# EAGLE board Mother Board_ver2.0.0 (EAGLE 9.6.2)
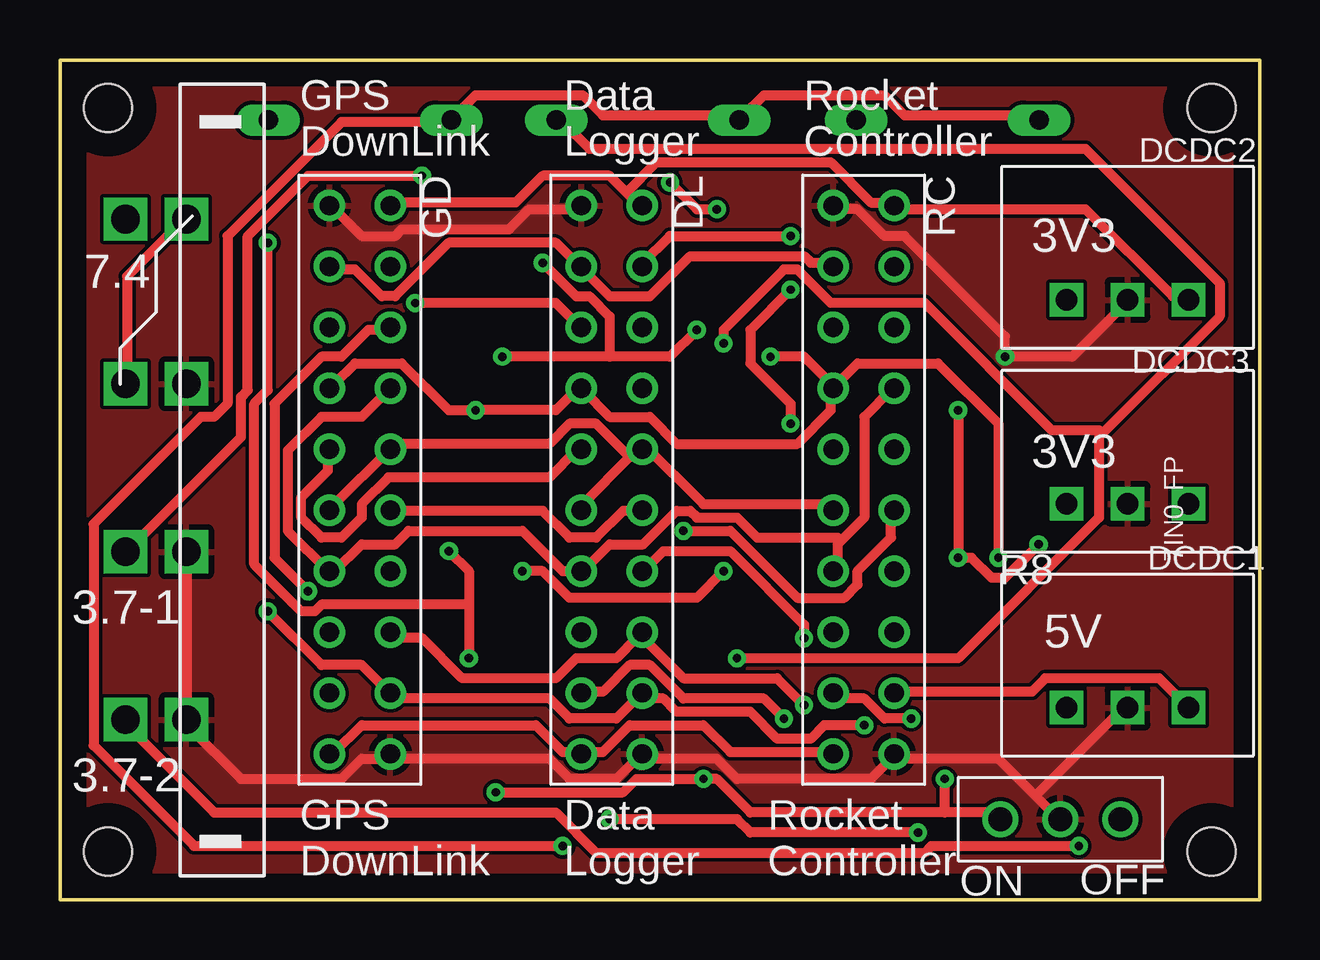
[diagram p0: board, top side]
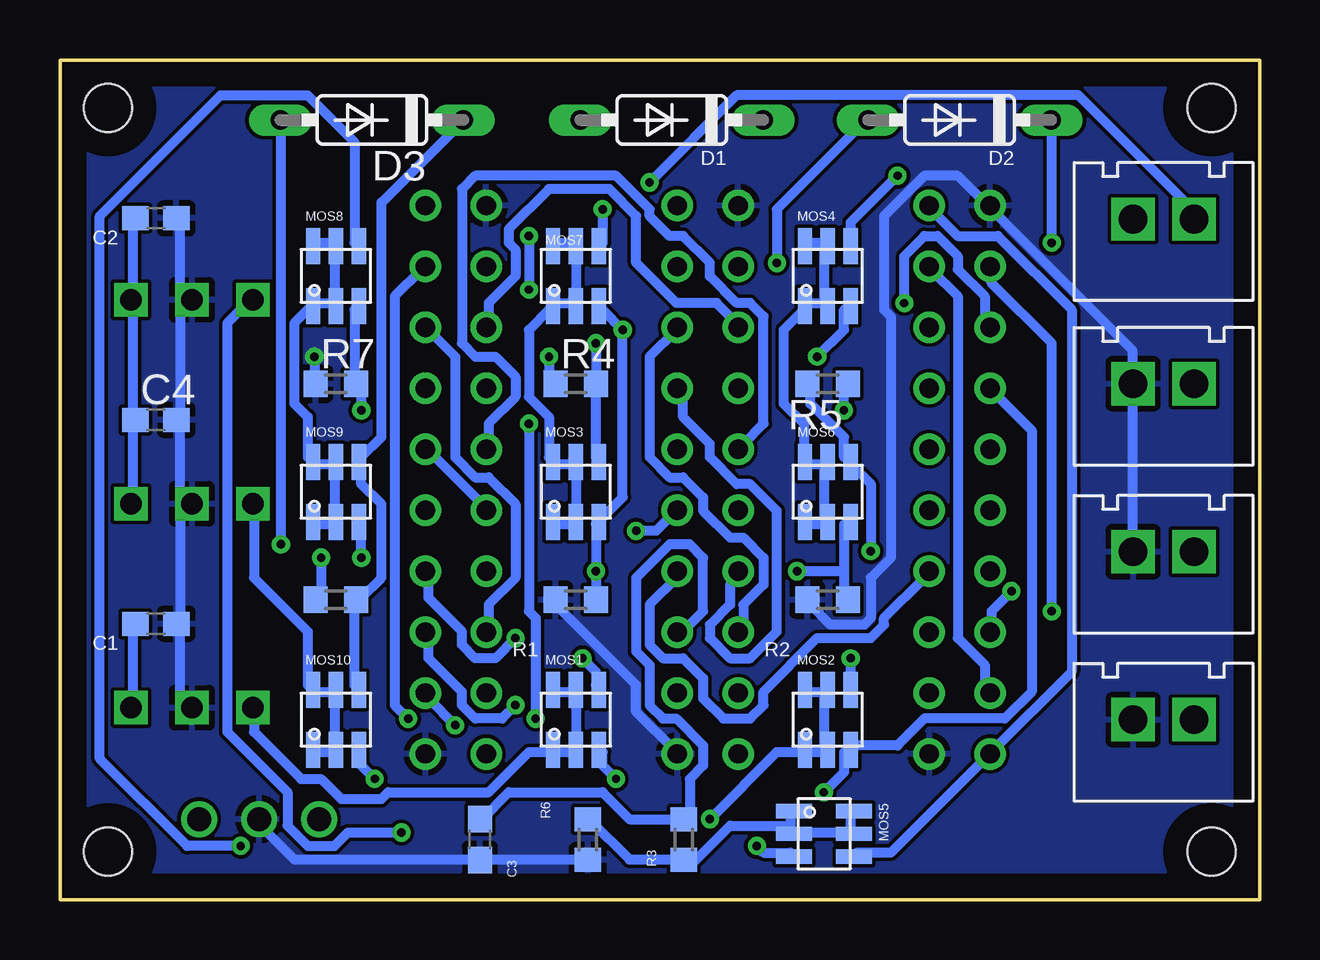
[diagram p1: board, bottom side, seen from below]

Size 50 x 35 mm. Coordinates in mm from the lower left corner, seen from the top.
Outline: 0,0 50,0 50,35 0,35 0,0
Copper layers (1*16): Top 0.035mm / dielectric 1.5mm / Bottom 0.035mm
Design rules "default": minimum track width 6mil, minimum drill 0.35mm, track to track 6mil, track to pad 6mil, pad to pad 6mil, via to via 6mil, smd to smd 6mil, copper to edge 40mil, drill to drill 6mil, minimum pad ring 10mil, minimum via ring 8mil, stop-mask expansion 4mil, vias tented up to drill 0mil, thermal gap 10mil
Net classes: 0 default: width 0.406 mm; 1 esp: width 0.406 mm, drill 0.127 mm, clearance 0.025 mm
Holes 2 mm at 2,33 48,33 2,2 48,2

## Footprints (pad centres in the part's own frame; a part is rotated, then mirrored left to right if it is on the bottom)
C0603 = smd 1.1 x 1: 1 -0.85,0; 2 0.85,0
2PIN = drill 1.2 square: P$1 -1.27,0; P$2 1.27,0
DO35-7 = drill 0.813 long: A 3.81,0; C -3.81,0
5V1A_M78AR05-1 = drill 0.9 pad 1.27 square: GND 0,0; VIN 2.54,0; VOUT -2.54,0
3.3V1A_M78AR033-1 = drill 0.9 pad 1.27 square: GND 0,0; VIN 2.54,0; VOUT -2.54,0
2X10 = drill 0.8: P$1 0,1.27; P$2 0,-1.27; P$3 -2.54,1.27; P$4 -2.54,-1.27; P$5 -5.08,1.27; P$6 -5.08,-1.27; P$7 -7.62,1.27; P$8 -7.62,-1.27; P$9 -10.16,1.27; P$10 -10.16,-1.27; P$11 -12.7,1.27; P$12 -12.7,-1.27; P$13 -15.24,1.27; P$14 -15.24,-1.27; P$15 -17.78,1.27; P$16 -17.78,-1.27; P$17 -20.32,1.27; P$18 -20.32,-1.27; P$19 -22.86,1.27; P$20 -22.86,-1.27
SSM6J808R = smd 0.6 x 1.5: 1 -0.95,-1.25; 2 0,-1.25; 3 0.95,-1.25; 4 0.95,1.25; 5 0,1.25; 6 -0.95,1.25
R0603 = smd 1 x 1.1: 1 -0.85,0; 2 0.85,0
SRIDE_SWITCH = drill 1: L -2.5,0; LR 0,0; R 2.5,0

## Placement (x,y rotation side)
C1  3.3uF  [C0603]  46,11.5 0 bottom
C2  3.3uF  [C0603]  46,28.4 0 bottom
C3  10uF  [C0603]  32.5,2.5 270 bottom
C4  3.3uF  [C0603]  46,20 0 bottom
CON1  [2PIN]  4,21.5 0 bottom
CON2  [2PIN]  4,14.5 0 bottom
CON3  [2PIN]  4,7.5 0 bottom
CON4  [2PIN]  4,28.37 0 bottom
D1  1N4148DO35-7  [DO35-7]  24.5,32.5 180 bottom
D2  1N4148DO35-7  [DO35-7]  12.5,32.5 180 bottom
D3  1N4148DO35-7  [DO35-7]  37,32.5 180 bottom
DCDC1  [5V1A_M78AR05-1]  44.5,8 180 top
DCDC2  [3.3V1A_M78AR033-1]  44.5,25 180 top
DCDC3  [3.3V1A_M78AR033-1]  44.5,16.5 180 top
DL  [2X10]  23,6.07 270 top
GD  [2X10]  12.5,6.07 270 top
MOS1  [SSM6J808R]  28.5,7.5 0 bottom
MOS2  [SSM6J808R]  18,7.5 0 bottom
MOS3  [SSM6J808R]  28.5,17 0 bottom
MOS4  [SSM6J808R]  18,26 0 bottom
MOS5  [SSM6J808R]  18.15,2.74 270 bottom
MOS6  [SSM6J808R]  18,17 0 bottom
MOS7  [SSM6J808R]  28.5,26 0 bottom
MOS8  [SSM6J808R]  38.5,26 0 bottom
MOS9  [SSM6J808R]  38.5,17 0 bottom
MOS10  [SSM6J808R]  38.5,7.5 0 bottom
R1  1k  [R0603]  28.5,12.5 0 bottom
R2  1k  [R0603]  18,12.5 0 bottom
R3  1k  [R0603]  24,2.5 90 bottom
R4  100k  [R0603]  28.5,21.5 0 bottom
R5  100k  [R0603]  18,21.5 180 bottom
R6  10k  [R0603]  28,2.5 90 bottom
R7  1k  [R0603]  38.5,21.5 0 bottom
R8  100k  [R0603]  38.5,12.5 0 bottom
RC  [2X10]  33.5,6.07 270 top
SW1  SRIDE_SWITCH  [SRIDE_SWITCH]  41.7,3.35 0 top

## Library data of the parts
C1-C4 = rcl; SPICEPREFIX: C
CON1-CON4 = XR Connector
D1-D3 = diode
DCDC1-DCDC3 = DC-DC
DL GD RC = PinSocket
MOS1-MOS10 = Chip MOSFET
R1-R8 = rcl; SPICEPREFIX: R
SW1 = Sride Switch

## Nets
3.3_RAW1: CON4.P$2 MOS7.4
3.3_RAW2: CON1.P$2 CON4.P$1
3.3_RAW3: CON2.P$2 MOS4.4
3.3_RAW4: CON3.P$2 MOS8.4
+3V3: C2.1 C4.1 DCDC2.VOUT DCDC3.VOUT DL.P$2 DL.P$19 GD.P$2 GD.P$19 MOS5.4 RC.P$2 RC.P$19
+5V: C1.1 DCDC1.VOUT DL.P$3 DL.P$18 GD.P$3 GD.P$18 RC.P$3 RC.P$18
+5V1: DCDC1.VIN MOS1.1 MOS1.2 MOS1.5 MOS1.6
BIT1: DL.P$9 GD.P$9 RC.P$9
BIT2: DL.P$7 GD.P$7 RC.P$7
FP: D1.A D2.A D3.A MOS3.3 MOS4.3 MOS5.3 MOS6.3 MOS7.3 MOS8.3 MOS9.3 R1.2 R2.2 R7.2
FP_CHECKER: C3.1 DL.P$5 GD.P$5 R3.2 RC.P$5
FPRAW: DL.P$12 GD.P$12 RC.P$12
GND: C1.2 C2.2 C3.2 C4.2 CON1.P$1 CON2.P$1 CON3.P$1 DCDC1.GND DCDC2.GND DCDC3.GND DL.P$1 DL.P$20 GD.P$1 GD.P$20 R1.1 R2.1 R6.1 R7.1 RC.P$1 RC.P$20 SW1.LR
LOGRX: DL.P$8 DL.P$13 GD.P$8 GD.P$13 RC.P$8 RC.P$13
LOGTX: DL.P$10 DL.P$11 GD.P$10 GD.P$11 RC.P$10 RC.P$11
N$1: D2.C MOS2.4 MOS6.4 R5.2
N$2: MOS4.1 MOS4.2 MOS4.5 MOS4.6 MOS6.1 MOS6.2 MOS6.5 MOS6.6
N$3: D3.C MOS9.4 MOS10.4 R8.2
N$4: MOS8.1 MOS8.2 MOS8.5 MOS8.6 MOS9.1 MOS9.2 MOS9.5 MOS9.6
N$5: DCDC2.VIN MOS2.1 MOS2.2 MOS2.5 MOS2.6
N$6: DCDC3.VIN MOS10.1 MOS10.2 MOS10.5 MOS10.6
N$11: D1.C MOS1.4 MOS3.4 R4.2
N$12: MOS3.1 MOS3.2 MOS3.5 MOS3.6 MOS7.1 MOS7.2 MOS7.5 MOS7.6
N$14: MOS5.1 MOS5.2 MOS5.5 MOS5.6 R3.1 R6.2
PWM: DL.P$16 GD.P$16 RC.P$16
SCL0: RC.P$6 RC.P$15
SCL1: DL.P$6 DL.P$15
SCL2: GD.P$6 GD.P$15
SDA0: RC.P$4 RC.P$17
SDA1: DL.P$4 DL.P$17
SDA2: GD.P$4 GD.P$17
SW: DL.P$14 GD.P$14 MOS1.3 MOS2.3 MOS10.3 R4.1 R5.1 R8.1 RC.P$14 SW1.L

## Tracks (layer width: path | path; a pad name or v marks a point on that pad's centre or on a via)
3.3_RAW1  (via drill 0.35)
  Top 0.406: v27.38,28.78 26.54,28.78 v25.43,29.9
  Bottom 0.406: v27.38,28.78 27.38,27.38 MOS7.4 | v25.43,29.9 21.79,33.53 7.54,33.53 2.52,28.5 CON4.P$2
3.3_RAW2
  Top 0.406: CON1.P$2 2.79,21.51 2.79,25.98 5.03,28.22 CON4.P$1
3.3_RAW3  (via drill 0.35)
  Top 0.406: v15.09,30.18 10.34,30.18 7.82,27.66 7.82,21.23 7.54,20.95 7.54,19.28 2.79,14.53 CON2.P$2
  Bottom 0.406: v15.09,30.18 17.04,28.22 17.04,27.38 MOS4.4
3.3_RAW4  (via drill 0.35)
  Top 0.406: v42.47,2.23 36.32,2.23 36.04,1.96 22.35,1.96 20.68,3.63 6.43,3.63 2.79,7.26 CON3.P$2
  Bottom 0.406: v42.47,2.23 44.7,2.23 48.34,5.87 48.34,28.5 43.31,33.53 39.67,33.53 37.72,31.57 37.72,27.38 MOS8.4
+3V3
  Top 0.406: GD.P$2 11.46,6.15 12.57,7.26 19.84,7.26 20.95,6.15 21.51,6.15 DL.P$2 21.79,6.15 22.63,6.15 23.75,7.26 26.82,7.26 27.94,6.15 32.13,6.15 RC.P$2 | 23.61,29.48 24.03,29.06 DL.P$19 | 23.61,29.48 22.91,30.18 20.12,30.18 19,29.06 13.97,29.06 GD.P$19 | 23.61,29.48 24.87,30.73 32.13,30.73 33.81,29.06 34.65,29.06 RC.P$19 34.92,28.78 42.75,28.78 46.38,25.15 46.94,25.15 DCDC2.VOUT
  Bottom 0.406: MOS5.4 16.76,1.96 15.37,1.96 11.46,5.87 GD.P$2 11.18,6.15 7.82,9.5 7.82,24.59 10.9,27.66 12.57,27.66 13.69,28.78 GD.P$19 | C2.1 46.94,28.22 46.94,25.15 DCDC2.VOUT 46.94,24.87 46.94,20.12 C4.1 46.94,19.84 46.94,16.76 DCDC3.VOUT
+5V  (via drill 0.35)
  Top 0.406: GD.P$18 11.46,26.26 12.29,26.26 13.41,25.15 13.97,25.15 16.2,27.38 20.68,27.38 21.51,26.54 DL.P$18 21.79,26.26 22.91,25.15 24.59,25.15 26.26,26.82 31.01,26.82 31.29,26.54 32.13,26.54 RC.P$18 | RC.P$3 34.92,8.66 40.51,8.66 41.07,9.22 45.82,9.22 46.94,8.1 DCDC1.VOUT | v33.53,7.26 31.85,7.26 31.29,6.71 29.9,6.71 28.78,7.82 25.7,7.82 25.15,8.38 24.31,8.38 DL.P$3 24.03,8.38 23.19,7.54 21.23,7.54 20.4,8.38 13.97,8.38 GD.P$3 13.69,8.66 12.57,9.78 10.9,9.78 v8.66,12.01
  Bottom 0.406: C1.1 46.94,11.46 46.94,8.1 DCDC1.VOUT | v33.53,7.26 34.65,8.38 RC.P$3 | v8.66,12.01 8.66,23.19 11.18,25.7 11.18,26.26 GD.P$18
+5V1
  Bottom 0.406: MOS1.6 29.34,8.66 28.78,8.66 MOS1.5 28.5,8.66 28.5,6.43 MOS1.2 28.78,6.15 29.34,6.15 MOS1.1 29.62,6.15 30.45,6.15 32.13,4.47 36.32,4.47 36.6,4.19 38.28,4.19 39.12,5.03 39.95,5.03 41.91,6.99 41.91,7.82 DCDC1.VIN
BIT1  (via drill 0.35)
  Top 0.406: GD.P$9 13.97,16.2 20.12,16.2 21.23,15.09 22.35,15.09 23.47,16.2 24.03,16.2 DL.P$9 | v25.98,15.37 27.94,15.37 30.73,12.57 32.69,12.57 33.25,13.13 33.25,13.69 34.65,15.09 34.65,16.2 RC.P$9
  Bottom 0.406: v25.98,15.37 25.15,15.37 24.31,16.2 DL.P$9
BIT2  (via drill 0.35)
  Top 0.406: v31.01,10.9 31.01,11.46 27.94,14.53 25.15,14.53 24.31,13.69 DL.P$7
  Bottom 0.406: GD.P$7 13.97,13.41 15.65,11.73 15.65,11.46 16.2,10.9 18.44,10.9 20.68,8.66 20.68,8.1 21.23,7.54 22.35,7.54 23.19,8.38 23.19,9.22 24.03,10.06 24.87,10.06 25.43,10.62 25.43,12.29 24.31,13.41 DL.P$7 | v31.01,10.9 31.85,10.06 32.69,10.06 33.25,10.62 33.25,11.18 34.65,12.57 34.65,13.41 RC.P$7
FP  (via drill 0.35)
  Top 0.406: 22.91,22.63 25.43,22.63 v26.54,23.75 | 22.91,22.63 v18.44,22.63 | v19.28,13.69 20.12,13.69 21.23,12.57 26.54,12.57 v27.66,13.69 | v37.44,20.4 v37.44,14.25 38,14.25 38.84,13.41 39.4,13.41 v40.79,14.81 | v20.95,2.23 5.59,2.23 1.4,6.43 1.4,15.65 5.87,20.12 6.43,20.12 6.99,20.68 6.99,27.66 11.73,32.41 16.2,32.41 D2.A 16.48,32.69 17.32,33.53 21.79,33.53 22.63,32.69 28.22,32.69 D1.A 28.5,32.69 29.34,33.53 34.37,33.53 35.2,32.69 40.79,32.69 D3.A | 22.91,22.63 22.91,24.31 22.07,25.15 21.51,25.15 v20.12,26.54
  Bottom 0.406: v18.44,22.63 17.32,23.75 17.32,24.59 MOS4.3 | MOS7.3 27.38,24.59 v26.54,23.75 26.54,16.76 27.38,15.93 MOS3.3 27.66,15.65 v27.66,13.69 27.66,12.57 R1.2 | 17.32,13.69 17.32,15.65 MOS6.3 | 17.32,13.69 17.32,12.57 R2.2 | v19.28,13.69 17.32,13.69 | MOS8.3 37.72,24.59 37.72,21.51 R7.2 37.44,21.23 v37.44,20.4 | v37.44,14.25 37.44,15.65 MOS9.3 | v20.95,2.23 20.68,1.96 19.56,1.96 MOS5.3 | v40.79,14.81 40.79,32.41 D3.A | v20.12,26.54 20.12,28.78 16.48,32.41 D2.A
FP_CHECKER  (via drill 0.35)
  Top 0.406: GD.P$5 13.97,10.9 15.09,10.9 16.76,9.22 20.68,9.22 21.51,10.06 23.19,10.06 24.03,10.9 DL.P$5 24.31,10.9 25.98,9.22 29.9,9.22 v31.01,8.1
  Bottom 0.406: C3.1 32.41,3.35 31.29,4.47 27.38,4.47 26.26,3.35 24.03,3.35 R3.2 23.75,3.35 23.75,5.03 23.19,5.59 23.19,6.43 24.31,7.54 24.87,7.54 25.43,8.1 25.43,9.78 25.98,10.34 25.98,13.41 24.59,14.81 23.75,14.81 23.19,14.25 23.19,12.01 24.03,11.18 DL.P$5 | v31.01,8.1 31.57,7.54 32.69,7.54 33.25,8.1 33.25,8.66 34.65,10.06 34.65,10.9 RC.P$5
FPRAW
  Top 0.406: GD.P$12 11.18,18.72 11.18,17.88 10.06,16.76 10.06,15.93 10.9,15.09 11.73,15.09 12.57,15.93 12.57,16.48 13.69,17.6 20.4,17.6 21.51,18.72 DL.P$12
  Bottom 0.406: RC.P$12 32.13,19 32.13,19.84 31.01,20.95 31.01,21.79 31.85,22.63 32.69,22.63 33.25,23.19 33.25,29.62 32.69,30.18 26.82,30.18 25.43,28.78 25.43,28.5 24.59,27.66 24.03,27.66 22.91,26.54 22.91,25.98 21.79,24.87 21.23,24.87 20.68,24.31 20.68,19.84 21.51,19 DL.P$12
GND  (via drill 0.35)
  Top 0.406: CON2.P$1 5.31,14.25 5.31,7.54 CON3.P$1 5.31,7.26 7.54,5.03 11.73,5.03 12.57,5.87 13.69,5.87 GD.P$1 13.97,5.87 20.4,5.87 21.23,5.03 23.19,5.03 24.03,5.87 DL.P$1 24.31,5.87 27.38,5.87 28.22,5.03 33.81,5.03 34.65,5.87 RC.P$1 34.92,5.87 39.12,5.87 40.65,4.33 | DL.P$20 21.51,28.78 19.56,28.78 18.72,27.94 14.25,27.94 13.97,27.66 12.57,27.66 11.46,28.78 GD.P$20 | 40.65,4.33 41.63,3.35 SW1.LR | DCDC2.GND 44.42,24.87 42.19,22.63 v39.4,22.63 39.4,23.47 35.2,27.66 34.37,27.66 33.25,28.78 32.41,28.78 RC.P$20 | 40.65,4.33 44.42,8.1 DCDC1.GND
  Bottom 0.406: CON2.P$1 5.31,14.53 5.31,21.23 CON1.P$1 5.31,21.51 5.31,22.91 11.18,28.78 GD.P$20 11.46,29.06 12.57,30.18 13.97,30.18 15.65,28.5 15.65,24.59 15.37,24.31 15.37,14.25 16.2,13.41 16.2,11.73 16.48,11.46 17.88,11.46 18.72,12.29 R2.1 | R1.1 29.34,12.29 25.98,8.94 25.98,7.82 24.31,6.15 DL.P$1 | R6.1 28.22,1.68 32.41,1.68 C3.2 32.69,1.68 40.23,1.68 41.63,3.07 SW1.LR | DCDC1.GND 44.7,8.1 44.98,8.38 44.98,11.46 C1.2 44.98,11.73 44.98,16.76 DCDC3.GND 44.7,16.76 44.98,17.04 44.98,19.84 C4.2 44.98,20.12 44.98,25.15 DCDC2.GND 44.7,25.15 44.98,25.43 44.98,28.22 C2.2 | v39.4,22.63 39.4,21.51 R7.1
  pour Top: -2.5,37 51.5,37 51.5,-2.5 -2.5,-2.5
  pour Bottom: -3.5,38.5 52.5,38.5 52.5,-4.5 -3.5,-4.5
LOGRX
  Top 0.406: 32.55,14.95 33.53,15.93 33.53,20.12 34.65,21.23 RC.P$13 | 32.55,14.95 32.41,14.81 32.41,13.69 RC.P$8 | GD.P$13 13.69,21.23 12.57,20.12 10.9,20.12 9.5,18.72 9.5,15.37 11.18,13.69 GD.P$8 11.46,13.69 12.57,14.81 13.97,14.81 14.53,15.37 19.28,15.37 20.95,13.69 21.51,13.69 DL.P$8 21.79,13.69 22.91,14.81 24.31,14.81 25.7,16.2 26.26,16.2 26.54,15.93 28.22,15.93 29.06,15.09 32.41,15.09 32.55,14.95
  Bottom 0.406: DL.P$13 24.03,21.23 24.03,20.12 22.91,19 22.91,18.44 21.79,17.32 21.23,17.32 20.12,16.2 20.12,11.18 21.23,10.06 22.07,10.06 22.91,10.9 22.91,11.46 22.07,12.29 22.07,13.13 21.79,13.41 DL.P$8
LOGTX
  Top 0.406: GD.P$10 11.46,16.48 13.69,18.72 GD.P$11 13.97,19 20.4,19 21.23,19.84 22.35,19.84 23.75,18.44 | 23.75,18.44 24.03,18.72 DL.P$11 | 23.75,18.44 21.79,16.48 DL.P$10 | 23.75,18.44 DL.P$11 | RC.P$10 32.13,16.48 26.82,16.48 24.31,19 DL.P$11
  Bottom 0.406: RC.P$10 32.41,16.48 34.65,18.72 RC.P$11
N$1  (via drill 0.35)
  Top 0.406: 17.04,12.29 17.04,13.69 v16.2,14.53 | 17.04,12.29 v17.04,10.06 | v8.66,27.38 8.66,21.23 8.1,20.68 8.1,13.97 10.06,12.01 10.62,12.01 10.9,12.29 17.04,12.29
  Bottom 0.406: R5.2 18.72,21.23 18.72,20.68 17.32,19.28 17.32,18.44 MOS6.4 17.04,18.16 16.2,17.32 v16.2,14.53 | v17.04,10.06 17.04,8.94 MOS2.4 | v8.66,27.38 8.66,32.41 D2.C
N$2
  Bottom 0.406: MOS6.1 18.72,15.65 18.16,15.65 MOS6.2 18.16,15.93 18.16,18.16 | 18.16,18.16 18.72,18.16 MOS6.6 19,18.44 19,19.84 19.84,20.68 19.84,23.75 19,24.59 MOS4.1 18.72,24.87 18.16,24.87 | 18.16,18.16 MOS6.5 | MOS4.6 18.72,27.38 18.16,27.38 MOS4.5 18.16,27.1 18.16,24.87 | 18.16,24.87 MOS4.2
N$3
  Bottom 0.406: MOS10.4 37.72,8.94 37.72,12.29 R8.2 37.44,12.57 36.6,13.41 36.6,16.48 37.44,17.32 37.44,18.16 MOS9.4 37.44,18.44 36.6,19.28 36.6,29.06 33.25,32.41 D3.C
N$4
  Bottom 0.406: MOS9.1 39.4,15.65 38.56,15.65 MOS9.2 38.56,15.93 38.56,18.16 | 38.56,18.16 39.4,18.16 MOS9.6 39.67,18.44 39.67,20.12 40.23,20.68 40.23,24.03 39.67,24.59 MOS8.1 39.4,24.87 38.56,24.87 | 38.56,18.16 MOS9.5 | MOS8.6 39.4,27.38 38.56,27.38 MOS8.5 38.56,27.1 38.56,24.87 | 38.56,24.87 MOS8.2
N$5  (via drill 0.35)
  Top 0.406: v22.91,3.35 28.22,3.35 28.78,2.79 v35.76,2.79
  Bottom 0.406: 18.16,8.66 18.72,8.66 MOS2.6 | 18.16,8.66 18.16,6.43 MOS2.2 18.16,6.15 18.72,6.15 MOS2.1 19,6.15 20.12,6.15 v22.91,3.35 | 18.16,8.66 MOS2.5 | v35.76,2.79 38,2.79 38.56,2.23 39.67,2.23 40.51,3.07 40.51,4.47 43.03,6.99 43.03,24.03 42.19,24.87 DCDC2.VIN
N$6
  Bottom 0.406: MOS10.1 39.4,6.15 38.56,6.15 MOS10.2 38.56,6.43 38.56,8.66 | 38.56,8.66 39.4,8.66 MOS10.6 39.67,8.94 39.67,11.18 41.91,13.41 41.91,16.48 DCDC3.VIN | 38.56,8.66 MOS10.5
N$11  (via drill 0.35)
  Top 0.406: v28.22,10.06 37.44,10.06 43.31,15.93 43.31,19.28 43.45,19.42 | 43.45,19.42 48.34,24.31 48.34,25.7 42.75,31.29 22.07,31.29 20.95,32.41 D1.C | v27.66,23.19 27.66,23.75 30.18,26.26 30.73,26.26 32.13,24.87 36.04,24.87 41.35,19.56 43.31,19.56 43.45,19.42
  Bottom 0.406: MOS3.4 27.66,18.44 27.66,21.23 R4.2 27.66,21.51 v27.66,23.19 | v28.22,10.06 27.66,9.5 27.66,8.94 MOS1.4
N$12
  Bottom 0.406: MOS3.1 29.34,15.65 28.78,15.65 MOS3.2 28.5,15.93 28.5,18.16 MOS3.5 28.78,18.16 29.34,18.16 MOS3.6 29.62,18.44 29.62,20.12 30.45,20.95 30.45,23.75 29.62,24.59 MOS7.1 29.34,24.87 28.78,24.87 MOS7.2 28.5,24.87 28.5,27.1 MOS7.5 28.78,27.38 29.34,27.38 MOS7.6
N$14
  Bottom 0.406: 17.04,2.79 17.04,3.63 MOS5.6 | 19.56,3.07 19.56,3.63 MOS5.1 | 19.56,3.07 19.56,2.79 MOS5.2 19.28,2.79 17.04,2.79 | 17.04,2.79 MOS5.5 | R6.2 27.94,3.35 26.26,1.68 24.03,1.68 R3.1 23.75,1.4 22.07,3.07 19.56,3.07
PWM  (via drill 0.35)
  Top 0.406: v14.81,24.87 20.68,24.87 21.51,24.03 DL.P$16
  Bottom 0.406: v14.81,24.87 14.81,26.82 13.97,27.66 13.41,27.66 12.57,26.82 12.57,26.26 11.46,25.15 11.46,24.03 GD.P$16 | RC.P$16 32.13,24.03 32.13,24.87 31.01,25.98 31.01,27.1 31.29,27.38 31.29,27.94 29.62,29.62 27.1,29.62 25.98,28.5 25.98,26.54 24.31,24.87 22.63,24.87 21.79,24.03 DL.P$16
SCL0
  Bottom 0.406: RC.P$6 32.13,11.18 32.13,12.29 31.01,13.41 31.01,16.48 32.13,17.6 32.69,17.6 33.53,18.44 33.53,22.63 34.65,23.75 RC.P$15
SCL1
  Bottom 0.406: DL.P$6 21.51,11.18 21.51,12.29 20.68,13.13 20.68,14.25 21.51,15.09 22.07,15.09 23.19,16.2 23.19,16.76 24.03,17.6 24.59,17.6 25.43,18.44 25.43,22.63 24.31,23.75 DL.P$15
SCL2  (via drill 0.35)
  Top 0.406: v10.34,12.85 8.94,14.25 8.94,20.68 10.9,22.63 11.73,22.63 12.85,23.75 13.69,23.75 GD.P$15
  Bottom 0.406: v10.34,12.85 11.18,12.01 11.18,11.18 GD.P$6
SDA0  (via drill 0.35)
  Top 0.406: v35.48,7.54 34.37,7.54 33.53,8.38 32.41,8.38 RC.P$4
  Bottom 0.406: v35.48,7.54 36.04,8.1 36.04,25.15 34.92,26.26 RC.P$17
SDA1  (via drill 0.35)
  Top 0.406: v30.18,7.54 29.34,8.38 25.98,8.38 24.59,9.78 23.75,9.78 22.63,8.66 21.79,8.66 DL.P$4 | v30.45,19.84 30.45,20.68 28.78,22.35 28.78,23.75 v30.45,25.43 | v30.45,27.66 25.43,27.66 24.31,26.54 DL.P$17
  Bottom 0.406: v30.18,7.54 30.18,11.73 30.45,12.01 v30.45,19.84 | v30.45,27.66 v30.45,25.43
SDA2
  Bottom 0.406: GD.P$4 11.46,8.66 11.46,9.78 12.57,10.9 12.57,25.15 13.69,26.26 GD.P$17
SW  (via drill 0.35)
  Top 0.406: v29.62,22.63 31.01,22.63 32.13,21.51 RC.P$14 | v39.12,14.25 39.12,19.84 36.6,22.35 33.25,22.35 32.41,21.51 RC.P$14 | 36.88,3.63 38.84,3.63 39.12,3.35 SW1.L | 36.88,3.63 28.78,3.63 27.38,5.03 v26.82,5.03 24.03,5.03 23.47,4.47 v18.16,4.47 | 36.88,3.63 v36.88,5.03 | GD.P$14 11.46,21.51 12.29,22.35 14.25,22.35 16.2,20.4 v17.32,20.4 20.68,20.4 21.51,21.23 DL.P$14 21.79,21.23 22.91,20.12 24.59,20.12 25.7,19 30.73,19 32.13,20.4 32.13,21.23 RC.P$14
  Bottom 0.406: v29.62,22.63 29.62,21.51 R4.1 | v39.12,14.25 39.12,12.57 R8.1 | v26.82,5.03 27.38,5.59 27.38,6.15 MOS1.3 | v36.88,5.03 37.44,5.59 37.44,6.15 MOS10.3 | v17.32,20.4 17.32,21.23 R5.1 | GD.P$14 11.18,21.23 9.5,19.56 9.5,8.66 10.62,7.54 13.97,7.54 15.09,6.43 17.04,6.43 MOS2.3 17.32,6.15 17.32,5.31 v18.16,4.47

## Text on the board
tPlace: GPS / DownLink | Data / Logger | Rocket / Controller | - | 3V3 | 7.4 | 3V3 | FP | 7IN0 | 3.7-1 | 5V | 3.7-2 | GPS / DownLink | Data / Logger | Rocket / Controller | - | ON | OFF